# EAGLE board TMC5130_3D_Printer_BOARD_V_2 (EAGLE 6.5.0), part 1 of 2
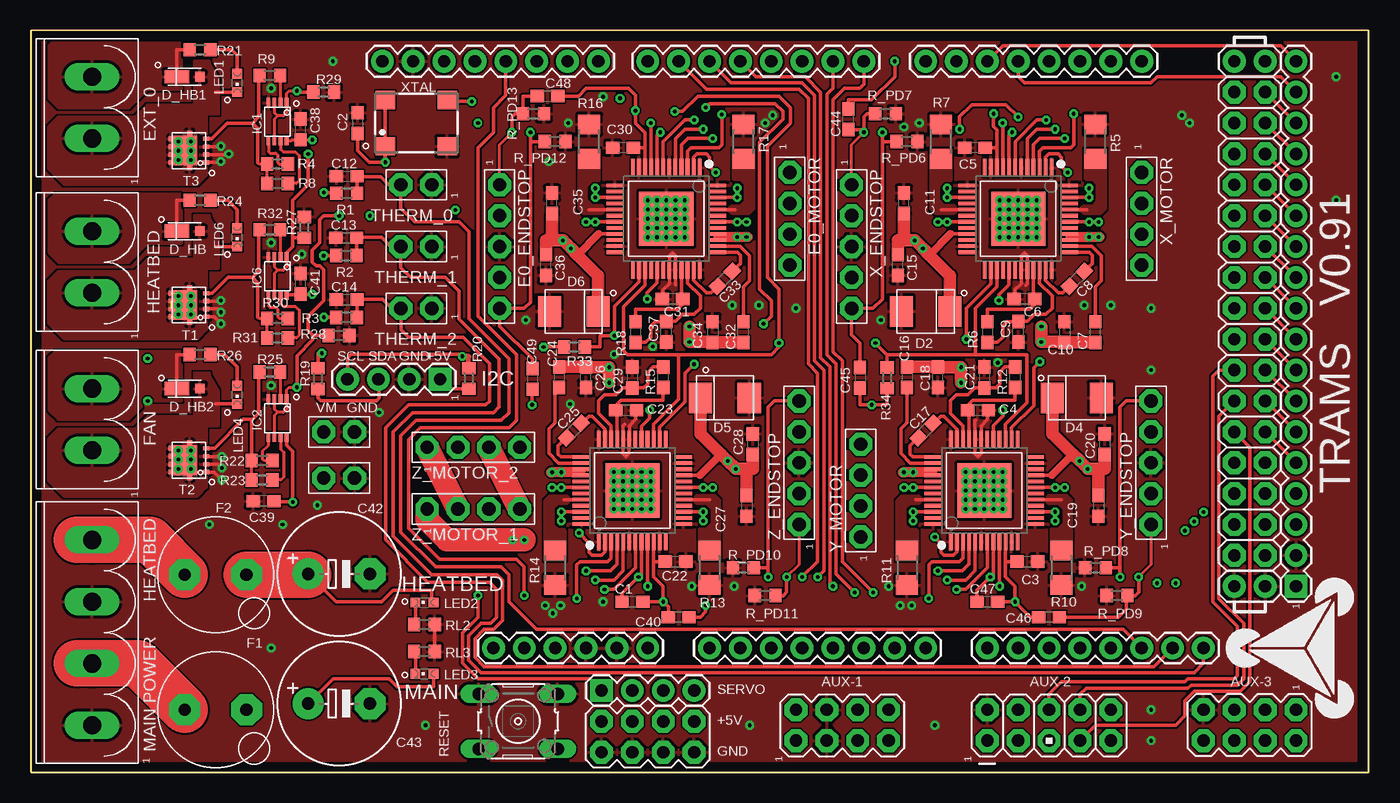
[diagram p0: board, top side]
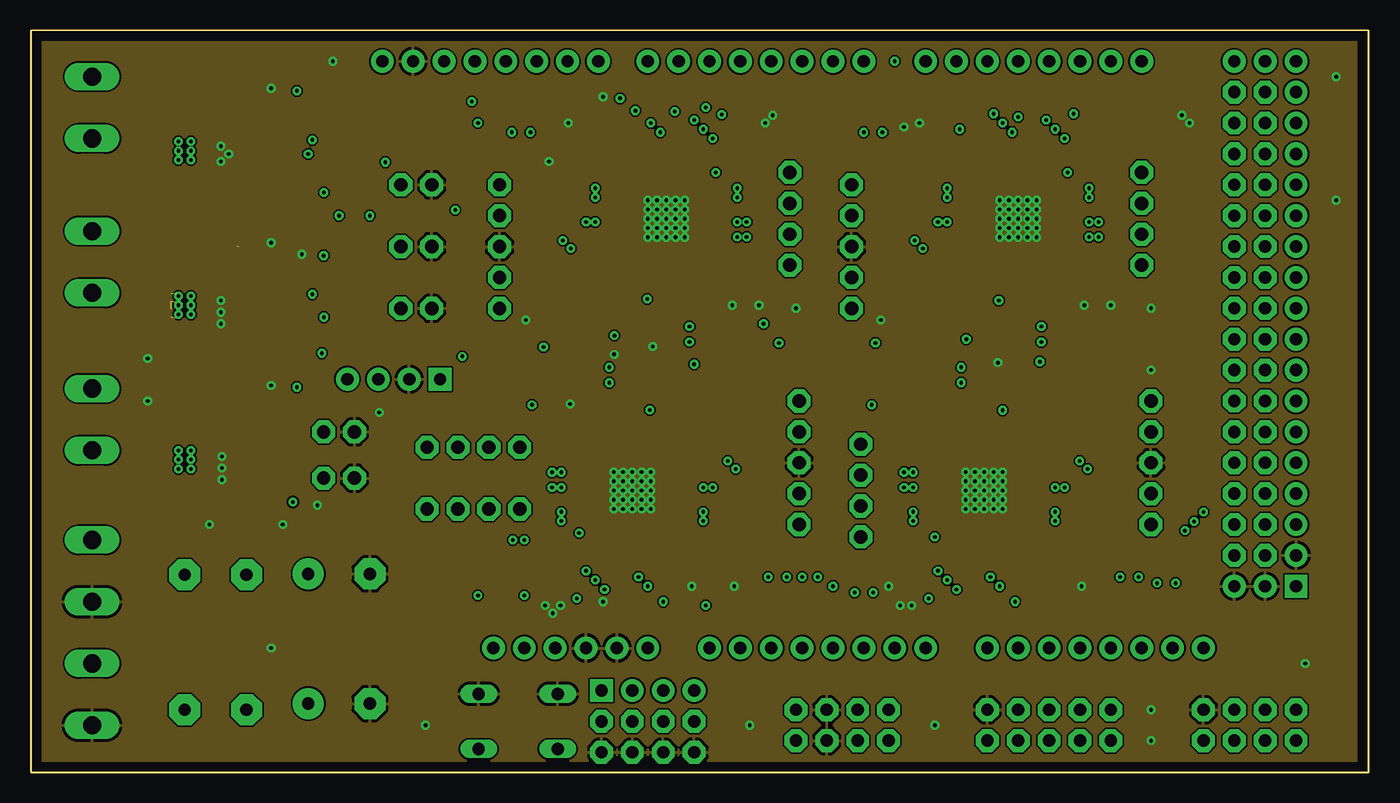
[diagram p1: board, inner layer Route2]
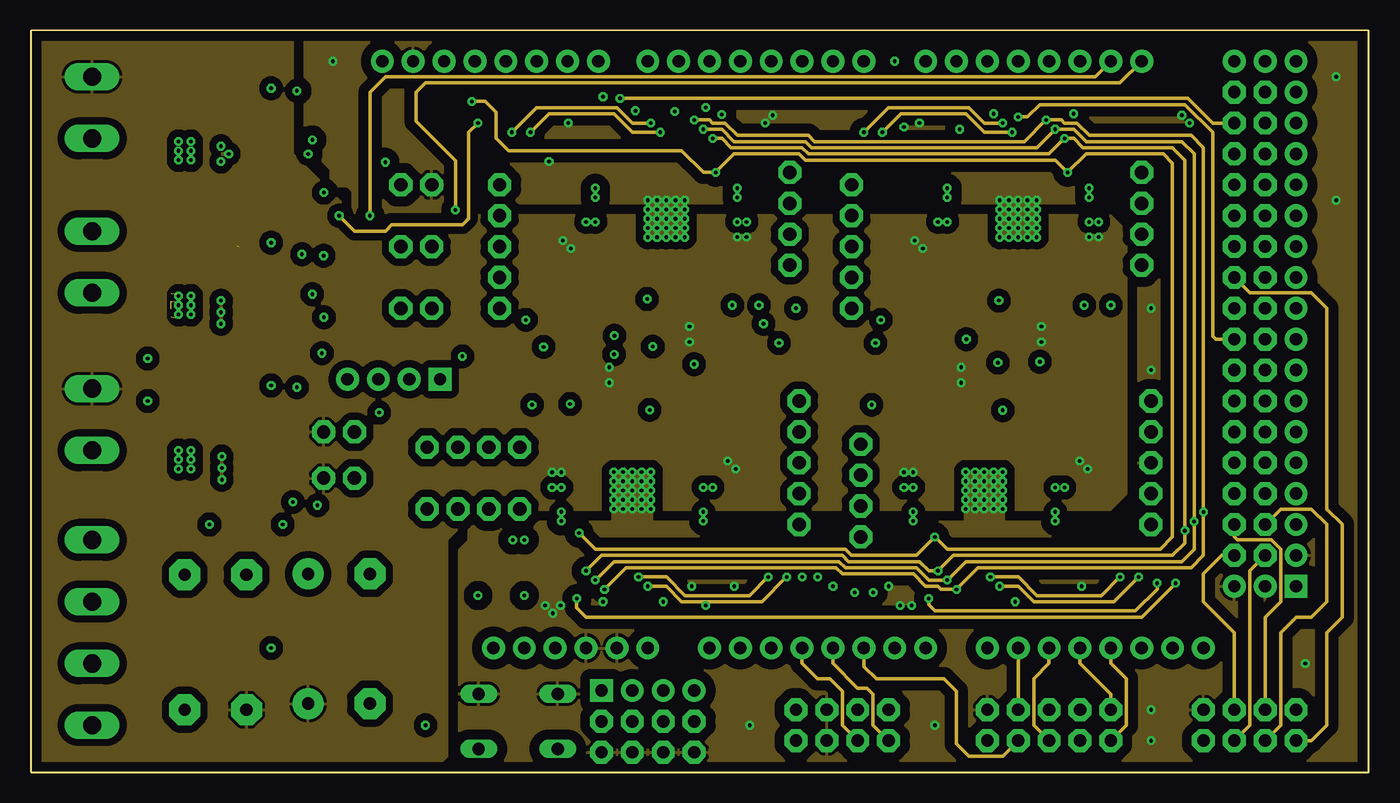
[diagram p2: board, inner layer Route3]
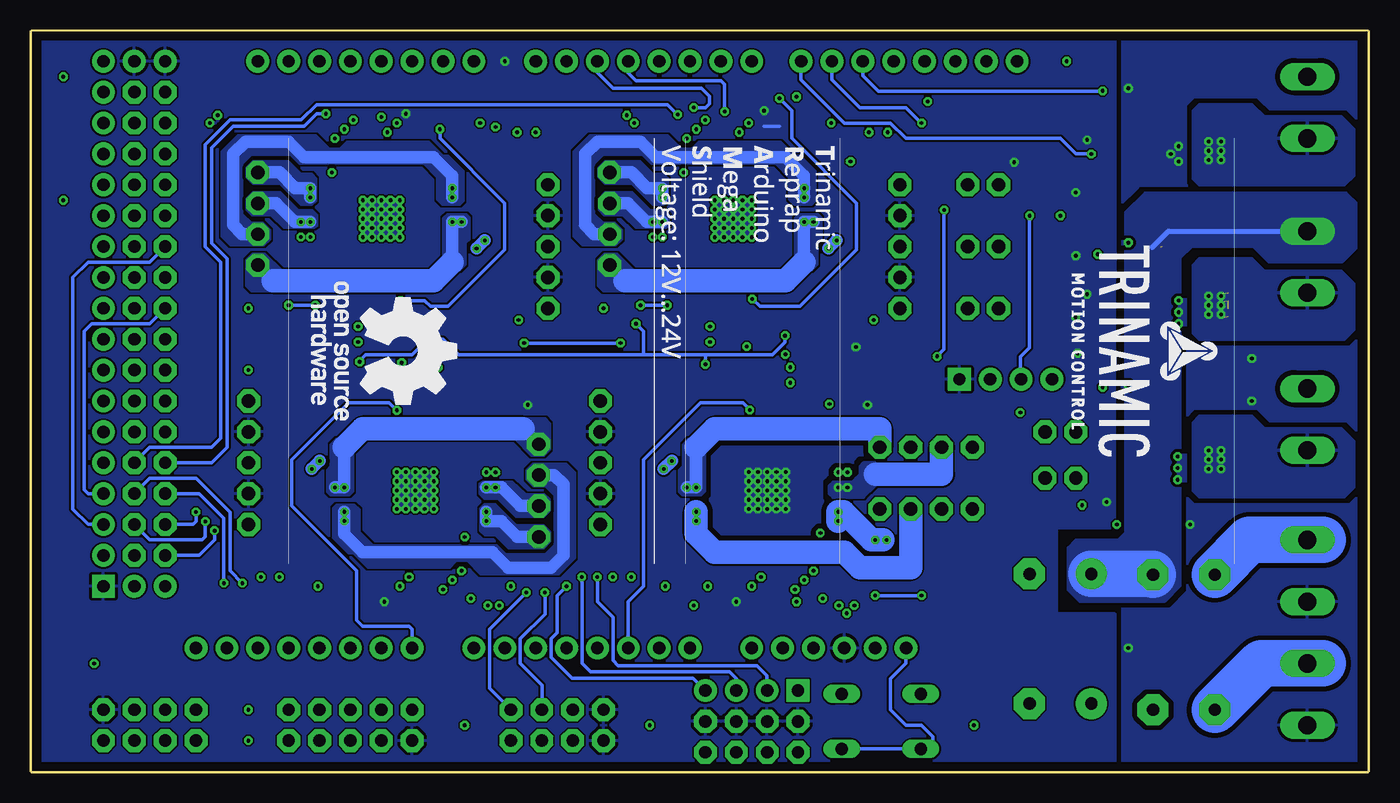
[diagram p3: board, bottom side, seen from below]

Size 110.15 x 60.95 mm. Coordinates in mm from the lower left corner, seen from the top.
Outline: 0,0 110.15,0 110.15,60.95 0,60.95 0,0
Copper layers (1*2*3*16): Top 0.018mm / dielectric 0.36mm / Route2 0.035mm / dielectric 0.71mm / Route3 0.035mm / dielectric 0.2mm / Bottom 0.018mm
Design rules "Default_WE_Euro *": minimum track width 0.15mm, minimum drill 0.25mm, track to track 0.15mm, track to pad 0.15mm, pad to pad 0.1mm, via to via 0.15mm, smd to smd 0mil, copper to edge 0.8mm, drill to drill 8mil, minimum pad ring 10mil, minimum via ring 8mil, stop-mask expansion 4mil, vias tented up to drill 0.4mm, thermal gap 10mil
Net classes: 2 gnd: width 0.203 mm, drill 0.381 mm, clearance 0.178 mm

## Footprints (pad centres in the part's own frame; a part is rotated, then mirrored left to right if it is on the bottom)
2X4 = drill 1.016 pad 1.88 octagon: 1 -3.81,-1.27; 2 -3.81,1.27; 3 -1.27,-1.27; 4 -1.27,1.27; 5 1.27,-1.27; 6 1.27,1.27; 7 3.81,-1.27; 8 3.81,1.27
AVR_ICSP = drill 1.016 pad 1.88 octagon: 1 -1.27,5.08; 2 1.27,5.08; 3 -1.27,2.54; 4 1.27,2.54; 5 -1.27,0; 6 1.27,0; 7 -1.27,-2.54; 8 1.27,-2.54; 9 -1.27,-5.08; 10 1.27,-5.08
1X18 = drill 1.016 pad 1.88 square: 1 0,0 | drill 1.016 pad 1.88: 2 2.54,0; 3 5.08,0; 4 7.62,0; 5 10.16,0; 6 12.7,0; 7 15.24,0; 8 17.78,0; 9 20.32,0; 10 22.86,0; 11 25.4,0; 12 27.94,0; 13 30.48,0; 14 33.02,0; 15 35.56,0; 16 38.1,0; 17 40.64,0; 18 43.18,0
0603 = smd 1.1 x 1: 1 -0.85,0; 2 0.85,0
C0603 = smd 1.1 x 1: 1 -0.85,0; 2 0.85,0
E5-10,5 = drill 1.016 pad 2.54: + -2.54,0 | drill 1.016 pad 2.54 octagon: - 2.54,0
SMB = smd 1.9 x 2.5: A 2,0; C -2,0
MICRO_SMP = smd 0.8 x 0.8: A 1.25,0 | smd 2 x 1.1: C -0.65,0
5PIN_1ROW_2.54_THT = drill 1.1 pad 1.9 octagon: 1 -5.08,0; 2 -2.54,0; 3 0,0; 4 2.54,0; 5 5.08,0
4PIN_1ROW_2.54_THT = drill 1.1 pad 1.9 octagon: 1 -3.81,0; 2 -1.27,0; 3 1.27,0; 4 3.81,0
RIA_AKL_220_2_PINS = drill 1.5 long: P$1 0,0; P$2 5.08,0
LITTLEFUSE_TR5_383_SERIES = drill 1 pad 2.54 octagon: P$1 -2.54,0; P$2 2.54,0
1X04 = drill 1.016 pad 1.88 square: 1 0,0 | drill 1.016 pad 1.88: 2 2.54,0; 3 5.08,0; 4 7.62,0
US8_DCU = smd 0.3 x 0.8: 1 -0.75,-1.55; 2 -0.25,-1.55; 3 0.25,-1.55; 4 0.75,-1.55; 5 0.75,1.55; 6 0.25,1.55; 7 -0.25,1.55; 8 -0.75,1.55
CHIPLED_0603 = smd 0.8 x 0.8: A 0,-0.75; C 0,0.75
RIA_AKL_220_4_PINS = drill 1.5 long: P$1 0,0; P$2 5.08,0; P$3 10.16,0; P$4 15.24,0
R0603 = smd 1 x 1.1: 1 -0.85,0; 2 0.85,0
R1206 = smd 1.6 x 1.803: 1 -1.422,0; 2 1.422,0
B3F-10XX = drill 1.016 long: 1 -3.251,2.261; 2 3.251,2.261; 3 -3.251,-2.261; 4 3.251,-2.261
ARDUINO_MEGA_SHIELD = drill 1.016 pad 1.88: 0 63.5,50.8; 1 60.96,50.8; 2 58.42,50.8; 3 55.88,50.8; 3.3V 35.56,2.54; 4 53.34,50.8; 5 50.8,50.8; 5V@0 38.1,2.54; 5V@1 93.98,50.8; 5V@2 96.52,50.8; 6 48.26,50.8; 7 45.72,50.8; 8 41.656,50.8; 9 39.116,50.8; 10 36.576,50.8; 11 34.036,50.8; 12 31.496,50.8; 13 28.956,50.8; 14 68.58,50.8; 15 71.12,50.8; 16 73.66,50.8; 17 76.2,50.8; 18 78.74,50.8; 19 81.28,50.8; 20 83.82,50.8; 21 86.36,50.8; A0 50.8,2.54; A1 53.34,2.54; A2 55.88,2.54; A3 58.42,2.54; A4 60.96,2.54; A5 63.5,2.54; A6 66.04,2.54; A7 68.58,2.54; A8 73.66,2.54; A9 76.2,2.54; A10 78.74,2.54; A11 81.28,2.54; A12 83.82,2.54; A13 86.36,2.54; A14 88.9,2.54; A15 91.44,2.54; AREF 23.876,50.8; GND@0 40.64,2.54; GND@1 43.18,2.54; GND@2 93.98,7.62; GND@3 96.52,7.62; GND@4 26.416,50.8; RESET 33.02,2.54; VIN 45.72,2.54 | drill 1.016 pad 1.88 octagon: 22 93.98,48.26; 23 96.52,48.26; 24 93.98,45.72; 25 96.52,45.72; 26 93.98,43.18; 27 96.52,43.18; 28 93.98,40.64; 29 96.52,40.64; 30 93.98,38.1; 31 96.52,38.1; 32 93.98,35.56; 33 96.52,35.56; 34 93.98,33.02; 35 96.52,33.02; 36 93.98,30.48; 37 96.52,30.48; 38 93.98,27.94; 39 96.52,27.94; 40 93.98,25.4; 41 96.52,25.4; 42 93.98,22.86; 43 96.52,22.86; 44 93.98,20.32; 45 96.52,20.32; 46 93.98,17.78; 47 96.52,17.78; 48 93.98,15.24; 49 96.52,15.24; 50 93.98,12.7; 51 96.52,12.7; 52 93.98,10.16; 53 96.52,10.16
DFN3X3_8L = smd 2.45 x 1.98: D0 1.227,-1.318 | smd 0.42 x 0.43: D1 -0.2,-1.675; D2 2.65,-1.675 | smd 0.4 x 0.36: D3 0.25,-0.15; D4 0.9,-0.15; D5 1.55,-0.15; D6 2.2,-0.15 | smd 0.35 x 0.5: G 2.2,-3.05; S0 0.25,-3.05; S1 0.9,-3.05; S2 1.55,-3.05
2PIN_1ROW_2.54_THT = drill 1.1 pad 1.9 octagon: 1 -1.27,0; 2 1.27,0
QFP50P900X900X113-49N_NOFID = smd 1.45 x 0.3: 1 -4.2,2.75; 2 -4.2,2.25; 3 -4.2,1.75; 4 -4.2,1.25; 5 -4.2,0.75; 6 -4.2,0.25; 7 -4.2,-0.25; 8 -4.2,-0.75; 9 -4.2,-1.25; 10 -4.2,-1.75; 11 -4.2,-2.25; 12 -4.2,-2.75; 25 4.2,-2.75; 26 4.2,-2.25; 27 4.2,-1.75; 28 4.2,-1.25; 29 4.2,-0.75; 30 4.2,-0.25; 31 4.2,0.25; 32 4.2,0.75; 33 4.2,1.25; 34 4.2,1.75; 35 4.2,2.25; 36 4.2,2.75 | smd 0.3 x 1.45: 13 -2.75,-4.2; 14 -2.25,-4.2; 15 -1.75,-4.2; 16 -1.25,-4.2; 17 -0.75,-4.2; 18 -0.25,-4.2; 19 0.25,-4.2; 20 0.75,-4.2; 21 1.25,-4.2; 22 1.75,-4.2; 23 2.25,-4.2; 24 2.75,-4.2; 37 2.75,4.2; 38 2.25,4.2; 39 1.75,4.2; 40 1.25,4.2; 41 0.75,4.2; 42 0.25,4.2; 43 -0.25,4.2; 44 -0.75,4.2; 45 -1.25,4.2; 46 -1.75,4.2; 47 -2.25,4.2; 48 -2.75,4.2 | smd 4.45 x 4.45: PAD 0,0
SM77H = smd 1.6 x 1.5: 1 -2.55,-1.9; 2 2.55,-1.9; 3 2.55,1.9; 4 -2.55,1.9

## Placement (x,y rotation side)
AUX-1  [2X4]  66.8,3.81 0 top
AUX-2  [AVR_ICSP]  83.82,3.81 90 top
AUX-3  [2X4]  100.33,3.81 180 top
AUX-4  [1X18]  104.14,15.24 90 top
C1  1nF  [0603]  49.53,13.97 0 top
C2  100nF  [C0603]  26.92,53.34 270 top
C3  100nF  [C0603]  82.04,17.27 0 top
C4  4.7µF  [C0603]  77.98,29.72 0 top
C5  100nF  [C0603]  77.72,51.31 180 top
C6  4.7µF  [C0603]  81.79,38.86 180 top
C7  100nF  [C0603]  87.63,36.14 90 top
C8  22nF  [C0603]  86.11,40.53 225 top
C9  470nF  [0603]  81.28,36.17 90 top
C10  100nF  [C0603]  85.09,36.14 270 top
C11  4.7µF  [C0603]  71.88,46.74 90 top
C12  100nF  [C0603]  26.04,48.96 0 top
C13  100nF  [C0603]  26,43.9 0 top
C14  100nF  [C0603]  26.04,38.82 0 top
C15  100nF  [C0603]  71.37,41.66 90 top
C16  100nF  [C0603]  72.14,32.44 270 top
C17  22nF  [C0603]  73.66,28.05 45 top
C18  100nF  [C0603]  74.68,32.44 90 top
C19  4.7µF  [C0603]  87.88,21.84 270 top
C20  100nF  [C0603]  88.39,26.92 270 top
C21  470nF  [0603]  78.49,32.41 270 top
C22  100nF  [C0603]  53.09,17.27 0 top
C23  4.7µF  [C0603]  49.02,29.72 0 top
C24  100nF  [C0603]  43.5,32.44 270 top
C25  22nF  [C0603]  44.7,28.05 45 top
C26  100nF  [C0603]  45.72,32.44 90 top
C27  4.7µF  [C0603]  58.93,21.84 270 top
C28  100nF  [C0603]  59.44,26.92 270 top
C29  C0603/470nF/16V  [C0603]  49.53,32.41 270 top
C30  100nF  [C0603]  48.77,51.31 180 top
C31  4.7µF  [C0603]  52.83,38.86 180 top
C32  100nF  [C0603]  58.67,36.14 90 top
C33  22nF  [C0603]  57.15,40.53 225 top
C34  100nF  [C0603]  56.13,36.14 270 top
C35  4.7µF  [C0603]  42.93,46.74 90 top
C36  100nF  [C0603]  42.42,41.66 90 top
C37  470nF  [0603]  52.32,36.17 90 top
C38  100nF  [C0603]  22.25,52.81 90 top
C39  100nF  [C0603]  19.19,22.25 180 top
C40  1nF  [0603]  53.34,12.7 180 top
C41  100nF  [C0603]  22.25,40.12 90 top
C42  1000µ 30V  [E5-10,5]  25.4,16.26 0 top
C43  1000µ 30V  [E5-10,5]  25.4,5.59 0 top
C44  1nF  [0603]  67.31,53.66 90 top
C45  1nF  [0603]  68.26,32.38 270 top
C46  1nF  [0603]  83.82,12.7 180 top
C47  1nF  [0603]  78.74,13.97 0 top
C48  1nF  [0603]  42.55,55.56 0 top
C49  1nF  [0603]  41.31,32.29 270 top
D2  SMBJ43A  [SMB]  73.66,37.85 180 top
D4  SMBJ43A  [SMB]  86.11,30.73 0 top
D5  SMBJ43A  [SMB]  57.15,30.73 0 top
D6  SMBJ43A  [SMB]  44.7,37.85 180 top
D_HB  MSS1P6  [MICRO_SMP]  12.7,44.45 0 top
D_HB1  MSS1P6  [MICRO_SMP]  12.7,57.15 0 top
D_HB2  MSS1P6  [MICRO_SMP]  12.7,31.5 0 top
E0_ENDSTOP  5PIN_1ROWTHT  [5PIN_1ROW_2.54_THT]  38.61,43.18 270 top
E0_MOTOR  [4PIN_1ROW_2.54_THT]  62.48,45.47 270 top
EX_0  RIA_AKL_220_2_PINS  [RIA_AKL_220_2_PINS]  5.08,52.07 90 top
F1  LITTLEFUSE_TR5_383_SERIES  [LITTLEFUSE_TR5_383_SERIES]  15.24,5.08 0 top
F2  LITTLEFUSE_TR5_383_SERIES  [LITTLEFUSE_TR5_383_SERIES]  15.24,16.19 0 top
FAN  RIA_AKL_220_2_PINS  [RIA_AKL_220_2_PINS]  5.08,26.42 90 top
HEATBED  RIA_AKL_220_2_PINS  [RIA_AKL_220_2_PINS]  5.08,39.37 90 top
I2C  [1X04]  33.71,32.27 180 top
IC1  SN74LVC3G17DCUR  [US8_DCU]  20.34,53.45 180 top
IC2  SN74LVC3G17DCUR  [US8_DCU]  20.34,29.07 180 top
IC6  SN74LVC3G17DCUR  [US8_DCU]  20.34,40.75 180 top
LED1  RED  [CHIPLED_0603]  17.02,56.64 180 top
LED2  GREEN  [CHIPLED_0603]  32.43,13.91 90 top
LED3  GREEN  [CHIPLED_0603]  32.43,8.05 90 top
LED4  RED  [CHIPLED_0603]  17.02,30.99 180 top
LED6  RED  [CHIPLED_0603]  17.02,43.94 180 top
MAIN_IN  RIA_AKL_220_4_PINS  [RIA_AKL_220_4_PINS]  5.08,3.81 90 top
R1  4.7kΩ  [R0603]  26.02,47.56 180 top
R2  4.7kΩ  [R0603]  26,42.43 180 top
R3  4.7kΩ  [R0603]  26.02,37.36 180 top
R4  100Ω  [R0603]  20.34,49.96 0 top
R5  R1206,0R15/0.5W  [R1206]  87.63,51.82 270 top
R6  2.2Ω  [0603]  78.74,36.14 270 top
R7  R1206,0R15/0.5W  [R1206]  74.93,51.82 270 top
R8  100Ω  [R0603]  20.34,48.37 0 top
R9  100Ω  [R0603]  19.7,57.26 0 top
R10  R1206,0R15/0.5W  [R1206]  84.84,16.76 90 top
R11  R1206,0R15/0.5W  [R1206]  72.14,16.76 90 top
R12  2.2Ω  [0603]  81.03,32.44 90 top
R13  R1206,0R15/0.5W  [R1206]  55.88,16.76 90 top
R14  R1206,0R15/0.5W  [R1206]  43.18,16.76 90 top
R15  2.2Ω  [0603]  52.07,32.44 90 top
R16  R1206,0R15/0.5W  [R1206]  45.97,51.82 270 top
R17  R1206,0R15/0.5W  [R1206]  58.67,51.82 270 top
R18  2.2Ω  [0603]  49.78,36.14 270 top
R19  4.7kΩ  [R0603]  23.66,32.32 90 top
R20  4.7kΩ  [R0603]  36.07,32.33 270 top
R21  4.7kΩ  [R0603]  13.97,59.37 180 top
R22  100Ω  [R0603]  19.07,25.57 0 top
R23  100Ω  [R0603]  19.07,23.99 0 top
R24  4.7kΩ  [R0603]  13.97,46.99 180 top
R25  100Ω  [R0603]  19.7,32.88 0 top
R26  4.7kΩ  [R0603]  13.97,34.29 180 top
R27  4.7kΩ  [R0603]  22.54,44.77 90 top
R28  4.7kΩ  [R0603]  25.4,35.88 0 top
R29  4.7kΩ  [R0603]  24.13,55.88 0 top
R30  100Ω  [R0603]  20.34,37.26 0 top
R31  100Ω  [R0603]  20.34,35.67 0 top
R32  100Ω  [R0603]  19.7,44.56 0 top
R33  4.7kΩ  [R0603]  44.77,34.92 0 top
R34  4.7kΩ  [R0603]  70.48,32.38 90 top
R_PD6  100kΩ  [R0603]  72.14,51.82 180 top
R_PD7  100kΩ  [R0603]  70.36,54.1 180 top
R_PD8  100kΩ  [R0603]  87.63,16.76 0 top
R_PD9  100kΩ  [R0603]  89.41,14.48 0 top
R_PD10  100kΩ  [R0603]  58.67,16.76 0 top
R_PD11  100kΩ  [R0603]  60.45,14.48 0 top
R_PD12  100kΩ  [R0603]  43.18,51.82 180 top
R_PD13  100kΩ  [R0603]  41.4,54.1 180 top
RL2  4.7kΩ  [R0603]  32.43,12.1 180 top
RL3  4.7kΩ  [R0603]  32.43,9.86 180 top
S1  [B3F-10XX]  40.13,4.13 0 top
SERV_SUPPLY  [2X4]  50.8,2.86 180 top
SERVO  [1X04]  46.99,6.67 0 top
SHIELD  ARDUINO_MEGA_SHIELD_BIG  [ARDUINO_MEGA_SHIELD]  5.08,7.62 0 top
T1  AON7508  [DFN3X3_8L]  11.43,37.15 90 top
T2  AON7508  [DFN3X3_8L]  11.43,24.38 90 top
T3  AON7508  [DFN3X3_8L]  11.43,49.85 90 top
THERM0  2PIN_1ROW  [2PIN_1ROW_2.54_THT]  31.75,48.26 180 top
THERM1  2PIN_1ROW  [2PIN_1ROW_2.54_THT]  31.75,43.18 180 top
THERM2  2PIN_1ROW  [2PIN_1ROW_2.54_THT]  31.75,38.1 180 top
TMC1  [QFP50P900X900X113-49N_NOFID]  78.49,23.11 90 top
TMC2  [QFP50P900X900X113-49N_NOFID]  49.53,23.11 90 top
TMC3  [QFP50P900X900X113-49N_NOFID]  52.32,45.47 270 top
TMC5130  [QFP50P900X900X113-49N_NOFID]  81.28,45.47 270 top
U$10  [TRINAMIC_LOGO_WHITE_NOTEXT]  109.22,3.81 90 top
U$11  [TRAMS_PRINT]  88.9,52.07 270 bottom
VM0  2PIN_1ROW  [2PIN_1ROW_2.54_THT]  25.4,24.13 180 top
VM1  2PIN_1ROW  [2PIN_1ROW_2.54_THT]  25.4,27.94 180 top
X_ENDSTOP  5PIN_1ROWTHT  [5PIN_1ROW_2.54_THT]  67.56,43.18 270 top
X_MOTOR  [4PIN_1ROW_2.54_THT]  91.44,45.47 270 top
XTAL  SM77H 16MHz  [SM77H]  31.75,53.34 0 top
Y_ENDSTOP  5PIN_1ROWTHT  [5PIN_1ROW_2.54_THT]  92.2,25.4 90 top
Y_MOTOR  [4PIN_1ROW_2.54_THT]  68.33,23.11 90 top
Z_ENDSTOP  5PIN_1ROWTHT  [5PIN_1ROW_2.54_THT]  63.25,25.4 90 top
Z_MOTOR_1  [4PIN_1ROW_2.54_THT]  36.45,21.59 0 top
Z_MOTOR_2  [4PIN_1ROW_2.54_THT]  36.45,26.67 0 top

## Library data of the parts
AUX-1-AUX-4 I2C SERV_SUPPLY SERVO = SparkFun-Connectors
C1 C9 C21 C37 C40 C44-C49 R6 R12 R15 R18 = _TMC_TE_RCL
C2-C8 C10-C20 C22-C36 C38 C39 C41-C43 R1-R5 R7-R11 R13 R14 R16 R17 R19-R34 R_PD6-R_PD13 RL2 RL3 = rcl
D2 D4-D6 D_HB D_HB1 D_HB2 = _TMC_TE_D
E0_ENDSTOP E0_MOTOR THERM0 THERM1 THERM2 VM0 VM1 X_ENDSTOP X_MOTOR Y_ENDSTOP Y_MOTOR Z_ENDSTOP Z_MOTOR_1 Z_MOTOR_2 = _TMC_TE_con
EX_0 F1 F2 FAN HEATBED MAIN_IN SHIELD T1-T3 U$10 = TMC5130_ARDUINO_SHIELD
IC1 IC2 IC6 = Jochen_TRI
LED1-LED4 LED6 = led
S1 = switch-omron; MPN: B3F-1000; OC_FARNELL: 176432; OC_NEWARK: 36M3542
TMC1-TMC3 TMC5130 = Trinamic; OC_DIGIKEY: _
U$11 = LOGO
XTAL = crystal; OC_FARNELL: unknown; OC_NEWARK: unknown

## Nets
+5V: AUX-1.1 AUX-1.2 AUX-2.1 AUX-3.1 AUX-4.1 C1.2 C2.2 C3.1 C5.1 C22.1 C30.1 C38.1 C39.1 C40.2 C41.1 C44.2 C45.2 C46.2 C47.2 C48.2 C49.2 E0_ENDSTOP.2 E0_ENDSTOP.4 I2C.1 IC1.8 IC2.8 IC6.8 R1.2 R2.2 R3.2 R19.2 R20.2 R33.1 R34.1 SERV_SUPPLY.1 SERV_SUPPLY.3 SERV_SUPPLY.5 SERV_SUPPLY.7 SHIELD.5V@0 SHIELD.5V@1 SHIELD.5V@2 TMC1.10 TMC2.10 TMC3.10 TMC5130.10 X_ENDSTOP.2 X_ENDSTOP.4 XTAL.1 XTAL.4 Y_ENDSTOP.2 Y_ENDSTOP.4 Z_ENDSTOP.2 Z_ENDSTOP.4
A3: AUX-1.5 SHIELD.A3
A4: AUX-1.7 SHIELD.A4
A5: AUX-2.3 SHIELD.A5
A9: AUX-2.4 SHIELD.A9
A10: AUX-2.5 SHIELD.A10
A11: AUX-2.10 SHIELD.A11
A12: AUX-2.9 SHIELD.A12
CLK: TMC1.2 TMC2.2 TMC3.2 TMC5130.2 XTAL.3
CS_E0: SHIELD.47 TMC3.3
CS_X: SHIELD.46 TMC5130.3
CS_Y: SHIELD.49 TMC1.3
CS_Z: SHIELD.48 TMC2.3
D0: AUX-1.8 SHIELD.0
D1: AUX-1.6 SHIELD.1
D4: SERVO.4 SHIELD.4
D5: SERVO.3 SHIELD.5
D6: SERVO.2 SHIELD.6
D11: SERVO.1 SHIELD.11
D16: AUX-4.18 SHIELD.16
D17: AUX-4.17 SHIELD.17
D23: AUX-4.16 SHIELD.23
D25: AUX-4.15 SHIELD.25
D27: AUX-4.14 SHIELD.27
D29: AUX-4.13 SHIELD.29
D31: AUX-4.12 SHIELD.31
D32: AUX-4.3 SHIELD.32
D33: AUX-4.11 SHIELD.33
D34: AUX-3.2 SHIELD.34
D35: AUX-4.10 SHIELD.35
D36: AUX-4.4 SHIELD.36
D37: AUX-4.9 SHIELD.37
D39: AUX-4.8 SHIELD.39
D40: AUX-2.6 SHIELD.40
D41: AUX-4.7 SHIELD.41
D42: AUX-2.8 SHIELD.42
D43: AUX-4.6 SHIELD.43
D44: AUX-2.7 SHIELD.44
D45: AUX-4.5 SHIELD.45
D53: AUX-3.6 SHIELD.53
DRV_EN_E0: SHIELD.24 TMC3.29
DRV_EN_X: SHIELD.38 TMC5130.29
DRV_EN_Y: SHIELD.A8 TMC1.29
DRV_EN_Z: SHIELD.A2 TMC2.29
ENDSTOP_E0_LEFT: C49.1 E0_ENDSTOP.5 R_PD12.2 TMC3.8
ENDSTOP_E0_RIGHT: C48.1 E0_ENDSTOP.1 R_PD13.2 TMC3.9
ENDSTOP_X_LEFT: C45.1 R_PD6.2 TMC5130.8 X_ENDSTOP.5
ENDSTOP_X_RIGHT: C44.1 R_PD7.2 TMC5130.9 X_ENDSTOP.1
ENDSTOP_Y_LEFT: C47.1 R_PD8.2 TMC1.8 Y_ENDSTOP.5
ENDSTOP_Y_RIGHT: C46.1 R_PD9.2 TMC1.9 Y_ENDSTOP.1
ENDSTOP_Z_LEFT: C1.1 R_PD10.2 TMC2.8 Z_ENDSTOP.5
ENDSTOP_Z_RIGHT: C40.1 R_PD11.2 TMC2.9 Z_ENDSTOP.1
FAN: IC2.1 IC2.3 IC2.6 R28.1 SHIELD.9
GND: AUX-1.3 AUX-1.4 AUX-2.2 AUX-3.7 AUX-4.2 C2.1 C3.2 C4.2 C5.2 C6.2 C9.1 C10.1 C11.2 C12.1 C13.1 C14.1 C15.1 C18.1 C19.2 C20.1 C21.1 C22.2 C23.2 C26.1 C27.2 C28.1 C29.1 C30.2 C31.2 C34.1 C35.2 C36.1 C37.1 C38.2 C39.2 C41.2 C42.- C43.- D2.A D4.A D5.A D6.A E0_ENDSTOP.3 I2C.2 IC1.4 IC2.4 IC6.4 MAIN_IN.P$1 MAIN_IN.P$3 R5.1 R7.1 R10.1 R11.1 R13.1 R14.1 R16.1 R17.1 R27.2 R28.2 R29.2 R_PD6.1 R_PD7.1 R_PD8.1 R_PD9.1 R_PD10.1 R_PD11.1 R_PD12.1 R_PD13.1 RL2.1 RL3.1 S1.1 S1.2 SERV_SUPPLY.2 SERV_SUPPLY.4 SERV_SUPPLY.6 SERV_SUPPLY.8 SHIELD.GND@0 SHIELD.GND@1 SHIELD.GND@2 SHIELD.GND@3 SHIELD.GND@4 T1.S0 T1.S1 T1.S2 T2.S0 T2.S1 T2.S2 T3.S0 T3.S1 T3.S2 THERM0.1 THERM1.1 THERM2.1 TMC1.1 TMC1.6 TMC1.11 TMC1.13 TMC1.23 TMC1.31 TMC1.32 TMC1.36 TMC1.48 TMC1.PAD TMC2.1 TMC2.6 TMC2.11 TMC2.13 TMC2.23 TMC2.31 TMC2.32 TMC2.36 TMC2.48 TMC2.PAD TMC3.1 TMC3.6 TMC3.11 TMC3.13 TMC3.23 TMC3.31 TMC3.32 TMC3.36 TMC3.48 TMC3.PAD TMC5130.1 TMC5130.6 TMC5130.11 TMC5130.13 TMC5130.23 TMC5130.31 TMC5130.32 TMC5130.36 TMC5130.48 TMC5130.PAD VM0.1 VM1.1 X_ENDSTOP.3 XTAL.2 Y_ENDSTOP.3 Z_ENDSTOP.3
HEAT_E0: IC1.1 IC1.3 IC1.6 R29.1 SHIELD.10
HEATBED: IC6.1 IC6.3 IC6.6 R27.1 SHIELD.8
HEATBED_POWER: F2.P$1 MAIN_IN.P$4
INTERRUPT: R33.2 SHIELD.2 TMC1.26 TMC2.26 TMC3.26 TMC5130.26
M1A1_E0: E0_MOTOR.1 TMC3.46
M1A1_X: TMC5130.46 X_MOTOR.1
M1A1_Y: TMC1.46 Y_MOTOR.1
M1A1_Z: TMC2.46 Z_MOTOR_1.1
M1A2_E0: E0_MOTOR.2 TMC3.42
M1A2_X: TMC5130.42 X_MOTOR.2
M1A2_Y: TMC1.42 Y_MOTOR.2
M1A2_Z: TMC2.42 Z_MOTOR_2.2
M1B1_E0: E0_MOTOR.3 TMC3.15
M1B1_X: TMC5130.15 X_MOTOR.3
M1B1_Y: TMC1.15 Y_MOTOR.3
M1B1_Z: TMC2.15 Z_MOTOR_1.3
M1B2_E0: E0_MOTOR.4 TMC3.19
M1B2_X: TMC5130.19 X_MOTOR.4
M1B2_Y: TMC1.19 Y_MOTOR.4
M1B2_Z: TMC2.19 Z_MOTOR_2.4
MAIN_POWER: F1.P$1 MAIN_IN.P$2
MISO: AUX-3.3 SHIELD.50 TMC1.7 TMC2.7 TMC3.7 TMC5130.7
MOSI: AUX-3.4 SHIELD.51 TMC1.5 TMC2.5 TMC3.5 TMC5130.5
N$1: Z_MOTOR_1.2 Z_MOTOR_2.1
N$3: Z_MOTOR_1.4 Z_MOTOR_2.3
N$4: C17.1 TMC1.37
N$5: C17.2 TMC1.35
N$6: C16.2 TMC1.38
N$7: C6.1 R6.1 TMC5130.33
N$8: C8.1 TMC5130.37
N$9: C8.2 TMC5130.35
N$10: C7.2 TMC5130.38
N$11: C9.2 R6.2 TMC5130.34
N$12: C21.2 R12.2 TMC1.34
N$13: C4.1 R12.1 TMC1.33
N$14: C25.1 TMC2.37
N$15: C25.2 TMC2.35
N$16: C24.2 TMC2.38
N$17: C29.2 R15.2 TMC2.34
N$18: C23.1 R15.1 TMC2.33
N$19: C33.1 TMC3.37
N$20: C33.2 TMC3.35
N$21: C32.2 TMC3.38
N$22: C37.2 R18.2 TMC3.34
N$23: C31.1 R18.1 TMC3.33
N$24: LED3.C RL3.2
N$25: LED2.C RL2.2
N$26: LED6.A R24.1
N$27: D_HB1.A EX_0.P$1 LED1.C T3.D0 T3.D1 T3.D2 T3.D3 T3.D4 T3.D5 T3.D6
N$28: R4.1 R8.1 R9.1 T3.G
N$29: IC1.7 R8.2
N$30: IC1.5 R4.2
N$31: IC1.2 R9.2
N$32: LED1.A R21.1
N$36: D_HB2.A FAN.P$1 LED4.C T2.D0 T2.D1 T2.D2 T2.D3 T2.D4 T2.D5 T2.D6
N$37: R22.1 R23.1 R25.1 T2.G
N$38: D_HB.A HEATBED.P$1 LED6.C T1.D0 T1.D1 T1.D2 T1.D3 T1.D4 T1.D5 T1.D6
N$39: R30.1 R31.1 R32.1 T1.G
N$40: IC2.7 R23.2
N$41: IC2.5 R22.2
N$42: IC6.7 R31.2
N$43: IC6.5 R30.2
N$44: IC6.2 R32.2
N$45: IC2.2 R25.2
N$46: LED4.A R26.1
POSPULSE: R34.2 SHIELD.3 TMC1.27 TMC2.27 TMC3.27 TMC5130.27
RESET: S1.3 S1.4 SHIELD.RESET
SCK: AUX-3.5 SHIELD.52 TMC1.4 TMC2.4 TMC3.4 TMC5130.4
SCL: I2C.4 R20.1 SHIELD.21
SDA: I2C.3 R19.1 SHIELD.20
SENSE1: R5.2 TMC5130.44
SENSE2: R7.2 TMC5130.17
SENSE3: R10.2 TMC1.17
SENSE4: R11.2 TMC1.44
SENSE5: R13.2 TMC2.17
SENSE6: R14.2 TMC2.44
SENSE7: R16.2 TMC3.17
SENSE8: R17.2 TMC3.44
THERM0: C12.2 R1.1 SHIELD.A13 THERM0.2
THERM1: C13.2 R2.1 SHIELD.A14 THERM1.2
THERM2: C14.2 R3.1 SHIELD.A15 THERM2.2
V_HEATBED: C42.+ D_HB.C F2.P$2 HEATBED.P$2 LED2.A R24.2
VM: C7.1 C10.2 C11.1 C15.2 C16.1 C18.2 C19.1 C20.2 C24.1 C26.2 C27.1 C28.2 C32.1 C34.2 C35.1 C36.2 C43.+ D2.C D4.C D5.C D6.C D_HB1.C D_HB2.C EX_0.P$2 F1.P$2 FAN.P$2 LED3.A R21.2 R26.2 TMC1.21 TMC1.39 TMC1.40 TMC2.21 TMC2.39 TMC2.40 TMC3.21 TMC3.39 TMC3.40 TMC5130.21 TMC5130.39 TMC5130.40 VM0.2 VM1.2